# Altium PCB PCB_smart_home.PcbDoc
Units mil, origin at the board's own origin, x right, y up, seen from the top; angles counter-clockwise.
Board outline 3030 x 1590 mil, 2 copper layers (Top Layer, Bottom Layer); 22 components, 27 nets, 114 pads, 38 vias.
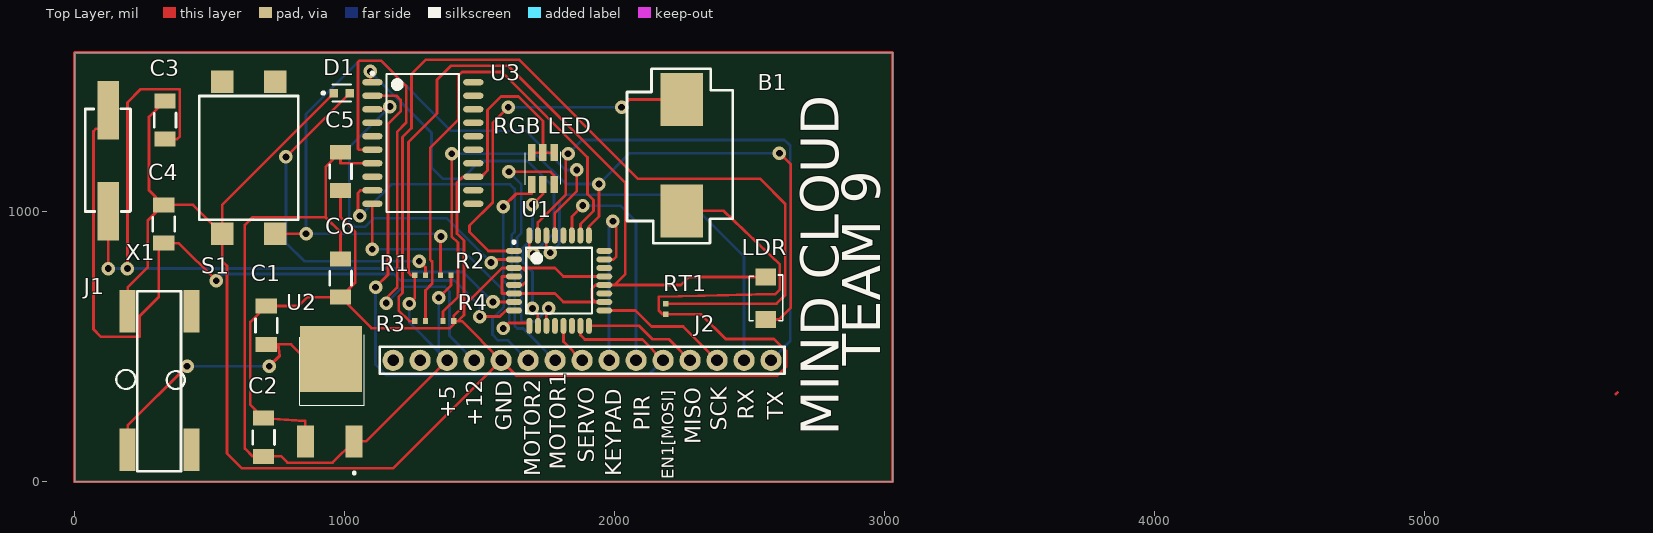
[diagram p0: Top Layer view]
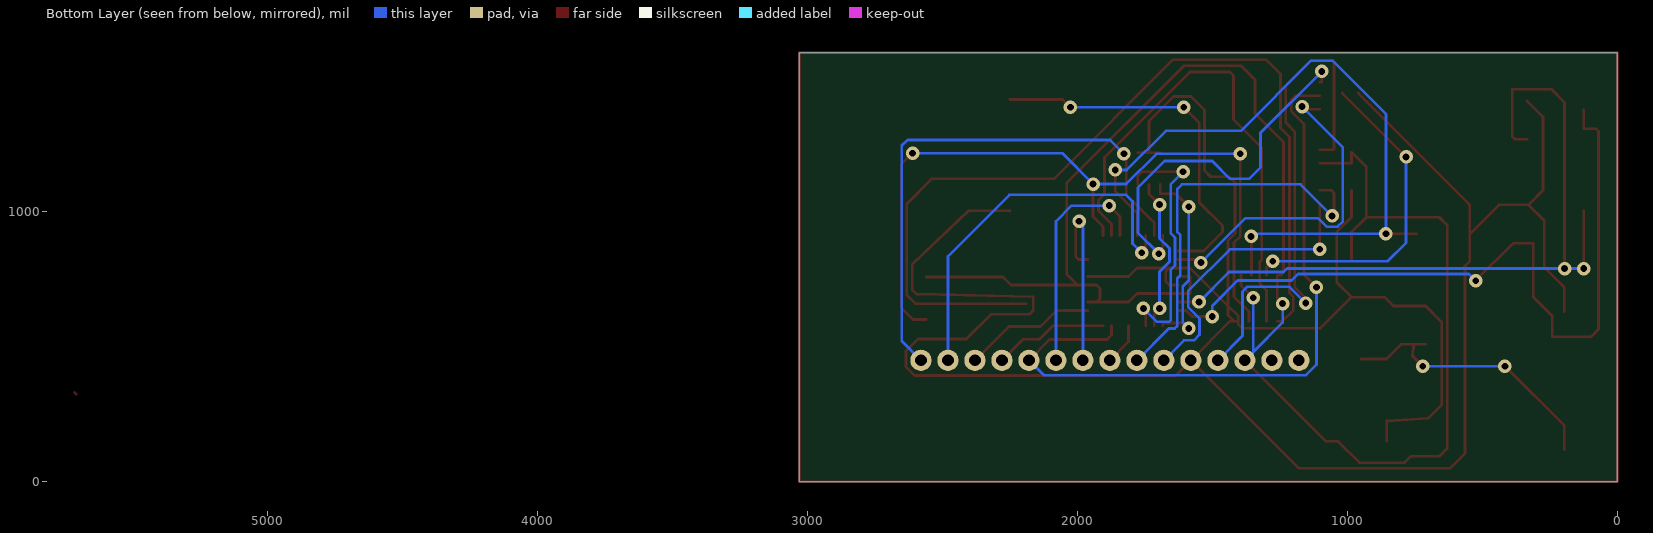
[diagram p1: Bottom Layer view, seen from below]

## Layer stack, top to bottom
Top Solder: solder mask 0.4, Solder Resist, Dk 3.5
Top Layer: signal copper 1.4
Dielectric 1: dielectric 12.6, FR-4, Dk 4.8
Bottom Layer: signal copper 1.4
Bottom Solder: solder mask 0.4, Solder Resist, Dk 3.5

## Board outline
0,0 0,1590 3030,1590 3030,0

## Design rules (kind name [scope] priority, off if disabled: settings)
Clearance [All] p1: gap=10 ignorepadtopadclearanceinfootprint=FALSE
PolygonConnect [All] p1: connectstyle=Relief reliefconductorwidth=10 reliefentries=4 polygonreliefangle="90 Angle" airgapwidth=10
RoutingVias [All] p1: holewidth=25 width=50 viastyle="Through Hole" minholewidth=25 minwidth=50 maxholewidth=25 maxwidth=50
SolderMaskExpansion [All] p1: expansion=4 istentingtop=FALSE
SupplyNets "Schematic Supply Nets_2" [InNet('+12')] p1: voltage=0.000
SupplyNets "Schematic Supply Nets_1" [InNet('GND')] p2: voltage=0.000
SupplyNets "Schematic Supply Nets" [InNet('+5')] p3: voltage=0.000
Width [All] p1: maxlimit=10 minlimit=10 preferedwidth=10
30 further rules are at their usual default settings.

## Components (designator, comment, footprint, x,y, rotation, side; value= is the part's Value field where it differs from the comment)
B1 "CMT-1271-88-SMT-TR" PCBComponent_1#1 2250,1210 r0 top
C1 "0.33uF" PCBComponent_1#2 710,580 r90 top
C2 "0.1uF" PCBComponent_1#2 700,165 r90 top
C3 "22PF" PCBComponent_1#2 335,1340 r90 top
C4 "22PF" PCBComponent_1#2 330,955 r90 top
C5 "100nF" PCBComponent_1#2 985,1150 r90 top
C6 "100nF" PCBComponent_1#2 985,755 r90 top
D1 "LTST-C191TBKT" FP-LTST-C191TBKT-MFG 990,1440 r0 top
J1 "PJ-002AH-SMT-TR" PCBComponent_1#3 315,375 r90 top
J2 "TSM-108-01-L-SV" Header 2580,450 r180 top
LDR "RS1G" PCBComponent_1#4 2560,680 r0 top
R1 "330 Ω" RESC1005X04N 1280,765 r0 top
R2 "1K" RESC1005X04N 1375,765 r0 top
R3 "resistor SMD" RESC1005X04N 1280.31,595 r0 top
R4 "10k" RESC1005X04N 1384.68,595 r0 top
"RGB LED" "ASMB-TTF2-0B20B" PCBComponent_1#5 1735,1160 r90 top
RT1 "10K" RESC1005X04N 2190,640 r90 top
S1 "TS16-1212-85-BK-100-SMT-TR" PCBComponent_1#6 645,1200 r90 top
U1 "ATMEGA8A-AU_C16190" TQFP80P900X900X120-32N 1795,745 r0 top
U2 "MC78M05ACDTRKG" PCBComponent_1#7 949.92,455 r270 top
U3 "Driver L293D" SOIC127P1030X265-20N 1290,1255 r0 top
X1 "16 MHZ" PCBComponent_1#8 125,1190 r90 top

## Footprints (in the part's own frame and the unit in brackets; to place one, negate y for a bottom-side part, rotate by r counter-clockwise, add the part's x,y. Pads: shape width x height; smd on the part's side, far side on the other; paste and mask are expansions set on the pad)
FP-LTST-C191TBKT-MFG [mm]
  rect 0.8x0.8 smd paste+0 mask+0: 1(-0.75,0) 2(0.75,0)
  silkscreen extent -1.87,-0.8 0.85,0.8, body extent -1.25,-0.55 1.25,0.55, height 0.25
Header [mm] "SIL Header"
  round 2 hole 1.1: 1(0,0) 2(2.54,0) 3(5.08,0) 4(7.62,0) 5(10.16,0) 6(12.7,0) 7(15.24,0) 8(17.78,0) 9(20.32,0) 10(22.86,0) 11(25.4,0) 12(27.94,0) 13(30.48,0) 14(33.02,0) 15(35.56,0)
  silkscreen extent -1.27,-1.27 36.83,1.27, body extent -1.33,-1.35 36.93,1.35, height 8.6
PCBComponent_1#1 [mm]
  rect 4x5 smd: 1(0,5.25) 2(0,-5.25)
  silkscreen extent -5.18,-8.28 4.78,8.13, body extent -6.55,-6.82 6.25,7.08, height 7.15
PCBComponent_1#2 [mm]
  rect 1.4x2 smd: 1(-1.8,0) 2(1.8,0)
  silkscreen extent -0.69,-1.04 0.66,1.02, body extent -1.65,-1 1.55,0.8, height 1.6
PCBComponent_1#3 [mm]
  rect 4x1.5 smd: 1(-6.5,3) 2(6.5,3) 3(6.5,-3) 4(-6.5,-3)
  silkscreen extent -8.53,-2.37 8.41,4.07, body extent -6.05,-6.93 6.55,7.97, height 11.01
PCBComponent_1#4 [mm]
  rect 1.9x1.6 smd: 1(0,2) 2(0,-2)
  silkscreen extent -1.55,-2.13 1.6,2.18, body extent -1.38,-2.54 1.18,2.6, height 2.58
PCBComponent_1#5 [mm]
  rect 1.6x0.7 smd: 1(-1.5,1.05) 2(1.5,1.05) 3(-1.5,0) 4(1.5,0) 5(-1.5,-1.05) 6(1.5,-1.05)
  silkscreen extent -1.52,-1.65 1.57,1.68, body extent -1.85,-1.72 1.85,1.78, height 2.8
PCBComponent_1#6 [mm]
  rect 2.1x2.1 smd: 1(-7.15,2.5) 2(-7.15,-2.5) 3(7.15,2.5) 4(7.15,-2.5)
  silkscreen extent -5.82,-4.67 5.82,4.65, body extent -7.6,-6.23 7.6,5.77, height 8.8
PCBComponent_1#7 [mm]
  rect 6.2x5.8 smd: 1(0,0)
  rect 3x1.6 smd: 2(7.747,2.159) 3(7.747,-2.411)
  silkscreen extent -2.29,-2.95 10.82,3.15, body extent -1.85,-3.3 8.05,3.2, height 2.59
PCBComponent_1#8 [mm]
  rect 5.5x2 smd: 1(-4.75,0) 2(4.75,0)
  silkscreen extent -4.8,-2.08 4.88,2.16, body extent -6.55,-2.33 6.65,2.47, height 4.31
RESC1005X04N [mm] "Chip Resistor, 2-Leads, Body 1.00x0.50mm, IPC Medium Density"
  rect 0.5x0.55 smd: 1(-0.5,0) 2(0.5,0)
  body extent -0.53,-0.28 0.53,0.28, height 0.4
SOIC127P1030X265-20N [mm] "SOIC, 20-Leads, Body 12.80x7.50mm, Pitch 1.27mm, IPC Medium Density"
  oval 1.9x0.6 smd: 1(-4.75,5.715) 2(-4.75,4.445) 3(-4.75,3.175) 4(-4.75,1.905) 5(-4.75,0.635) 6(-4.75,-0.635) 7(-4.75,-1.905) 8(-4.75,-3.175) 9(-4.75,-4.445) 10(-4.75,-5.715) 11(4.75,-5.715) 12(4.75,-4.445) 13(4.75,-3.175) 14(4.75,-1.905) 15(4.75,-0.635) 16(4.75,0.635) 17(4.75,1.905) 18(4.75,3.175) 19(4.75,4.445) 20(4.75,5.715)
  silkscreen extent -4.87,-6.5 3.4,6.69, body extent -5.16,-6.5 5.16,6.5, height 2.65
TQFP80P900X900X120-32N [mm] "TQFP, 32-Leads, Body 7.00x7.00mm, Pitch 0.80mm, IPC Medium Density"
  oval 1.5x0.55 smd: 1(-4.25,2.8) 2(-4.25,2) 3(-4.25,1.2) 4(-4.25,0.4) 5(-4.25,-0.4) 6(-4.25,-1.2) 7(-4.25,-2) 8(-4.25,-2.8) 17(4.25,-2.8) 18(4.25,-2) 19(4.25,-1.2) 20(4.25,-0.4) 21(4.25,0.4) 22(4.25,1.2) 23(4.25,2) 24(4.25,2.8)
  oval 0.55x1.5 smd: 9(-2.8,-4.25) 10(-2,-4.25) 11(-1.2,-4.25) 12(-0.4,-4.25) 13(0.4,-4.25) 14(1.2,-4.25) 15(2,-4.25) 16(2.8,-4.25) 25(2.8,4.25) 26(2,4.25) 27(1.2,4.25) 28(0.4,4.25) 29(-0.4,4.25) 30(-1.2,4.25) 31(-2,4.25) 32(-2.8,4.25)
  silkscreen extent -4.37,-3.1 3.1,3.75, body extent -4.5,-4.5 4.5,4.5, height 1.2

## Part data
B1: library part buzzer, "88dB Passive (external drive) Electromagnetic Type 2.4kHz Buzzers ROHS", manufactor=CUI, supplier part number=C3811771, ComponentLink1Description="snapeda link", ComponentLink1URL=https://www.snapeda.com/parts/CMT-1271-88-SMT-TR/CUI%20Devices/view-part/?ref=search&t=Buzzer%20smd, ComponentLink2Description=datasheet, ComponentLink2URL=https://www.snapeda.com/parts/CMT-1271-88-SMT-TR/CUI%20Devices/datasheet/, manufactor part number=CMT-1271-88-SMT-TR, supplier=LCSC
C1 C2 C3 C4 C5 C6: library part "capacitor_1206 CODE", "100V 100nF C0G ±5% 1206 Multilayer Ceramic Capacitors MLCC - SMD/SMT ROHS", manufactor="Murata Electronics", manufactor part number=GRM31C5C2A104JA01L, supplier part number=C405303, ComponentLink1Description="snapeda link", ComponentLink1URL=https://www.snapeda.com/parts/GRM31C5C2A104JA01L/Murata/view-part/?ref=search&t=1206%20cap%20smd, ComponentLink2Description=Datasheet, ComponentLink2URL=https://www.snapeda.com/parts/GRM31C5C2A104JA01L/Murata/datasheet/, supplier=LCSC
D1: library part CMP-22017-000008-1, "LED BLUE CLEAR CHIP SMD", Case Code (Imperial)=0603, Case Code (Metric)=1608, Color=Blue, Forward Current=20mA, Forward Voltage=3.8V, Lens Color=Colorless, Max Operating Temperature=80°C, Max Power Dissipation=75mW, Min Operating Temperature=-20°C, Package Quantity=1, Power Dissipation=76mW, Reverse Voltage=5V, Case/Package=0603, Depth=1.6mm, Dominant Wavelength=475nm, Height=0.55mm, Illumination Color=Blue, Lead Free="Lead Free", Length=0.8mm, Lens Style=Diffused, Lens Transparency=Clear, Luminous Intensity=180mcd, Mount="Surface Mount", Number of Elements=1, Number of LEDs=1, Number of Pins=2, Packaging="Tape and Reel", Radiation Hardening=No, Test Current=20mA, Viewing Angle=130°, Wavelength=468nm, Width=0.8mm
J1: library part "DC connector", "SMD DC Power Connectors ROHS", Manufacturer=CUI, package=SMD, supplier part number=C22434687, ComponentLink1Description="snapeda link", ComponentLink1URL=https://www.snapeda.com/parts/PJ-002AH-SMT-TR/CUI%20Devices/view-part/?ref=search&t=DC%20connector%20SMD, ComponentLink2Description=datasheet, ComponentLink2URL=https://www.snapeda.com/parts/PJ-002AH-SMT-TR/CUI%20Devices/datasheet/, Manufacturer part number=PJ-002AH-SMT-TR, supplier=LCSC
J2: package=None, Availability=Unavailable, MF=Samtec, MP=TSM-108-01-L-SV, Price=None
LDR: library part "LDR sensor", "1A Independent Type 1.3V@1A 400V SMA(DO-214AC) Diodes - General Purpose ROHS", manufactor="SMC(Sangdest Microelectronicstronic (Nanjing))", ComponentLink1Description=snapeda, ComponentLink1URL=https://www.snapeda.com/parts/RS1G/Taiwan%20Semiconductor/view-part/?ref=search&t=LDR%20sensor%20smd, ComponentLink2Description=datasheet, ComponentLink2URL=https://www.snapeda.com/parts/RS1G/Taiwan%20Semiconductor/datasheet/, manufactor part time=RS1G, supplier=LCSC, supplier part time=C260336
R1 R2 R3 R4: library part Resistor, "500mW Thick Film Resistors 400V ±100ppm/℃ ±1% 100Ω 1210 Chip Resistor - Surface Mount ROHS", Manufacturer=PANASONIC, Manufacturer part number=ERJ-U14F1000U, supplier part number=C1014086, ComponentLink1Description=Datasheet, ComponentLink1URL=https://www.lcsc.com/datasheet/lcsc_datasheet_2201131530_PANASONIC-ERJ-U14F1000U_C1014086.pdf, supplier=Lcsc
"RGB LED": library part "RGB LED", "PLCC-6 RGB LEDs ROHS", manufactor="Broadcom Limited", supplier part number=C6126294, ComponentLink1Description="snapeda link", ComponentLink1URL=https://www.snapeda.com/parts/ASMB-TTF2-0B20B/Broadcom%20%2F%20Avago/view-part/?ref=search&t=RGB%20led%20smd, ComponentLink2Description=datasheet, ComponentLink2URL=https://www.snapeda.com/parts/ASMB-TTF2-0B20B/Avago%20Technologies/datasheet/, ComponentLink3Description="LCSC link", ComponentLink3URL=https://www.lcsc.com/product-detail/RGB-LEDs_Broadcom-Limited-ASMB-TTF2-0B20B_C6126294.html, manufactor part number=ASMB-TTF2-0B20B, supplier=LCSC
RT1: library part "NTC temperature sensor", "10kΩ ±0.5% 3380K ±0.7% 0402 NTC Thermistors ROHS / Recommended For You", Manufacturer="Murata Electronics", Manufacturer part number=NCU15XH103D6SRC, supplier part number=C17294780, ComponentLink1Description=datasheet, ComponentLink1URL=https://www.lcsc.com/datasheet/lcsc_datasheet_2401291008_Murata-Electronics-NCU15XH103D6SRC_C17294780.pdf, supplier=lcsc
S1: library part switch, "50mA Standing paste SPST - normally open 100gf 12V Tactile Switches ROHS", manufactor=CUI, supplier part number=C6338790, ComponentLink1Description=snapeda, ComponentLink1URL=https://www.snapeda.com/parts/TS16-1212-85-BK-100-SMT-TR/CUI%20Devices/view-part/?ref=search&t=switch%20smd, ComponentLink2Description=datasheet, ComponentLink2URL=https://www.snapeda.com/parts/TS16-1212-85-BK-100-SMT-TR/CUI%20Devices/datasheet/, manufactor part time=TS16-1212-85-BK-100-SMT-TR, supplier=LCSC
U1: library part ATMEGA8A-AU, "8KB 1KB FLASH 23 2.7V~5.5V AVR 16MHz TQFP-32(7x7) Microcontrollers (MCU/MPU/SOC) ROHS", Manufacturer="Microchip Tech", supplier part number=C16190, ComponentLink1Description=Datasheet, ComponentLink1URL=https://www.lcsc.com/datasheet/lcsc_datasheet_1810161120_Microchip-Tech-ATMEGA8A-AU_C16190.pdf, Manufacturer part number=ATMEGA8A-AU, supplier=LCSC
U2: library part regulator, "500mA 80dB@(120Hz) Fixed 5V Positive electrode 35V TO-252-2(DPAK) Voltage Regulators - Linear, Low Drop Out (LDO) Regulators ROHS", Manufacturer=onsemi, supplier part number=C232660, ComponentLink1Description="snapeda link", ComponentLink1URL=https://www.snapeda.com/parts/MC78M05ACDTRKG/onsemi/view-part/?ref=search&t=regulator%205v%20smd, ComponentLink2Description=Datasheet, ComponentLink2URL=https://www.snapeda.com/parts/MC78M05ACDTRKG/onsemi/datasheet/, ComponentLink3Description="LCSC link", ComponentLink3URL=https://www.lcsc.com/product-detail/Voltage-Regulators-Linear-Low-Drop-Out-LDO-Regulators_onsemi-MC78M05ACDTRKG_C232660.html, Manufacturer part number=MC78M05ACDTRKG, supplier=LCSC
U3: "SOIC-20-300mil Stepper Motor Driver ROHS", Manufacturer=STMicroelectronics, Manufacturer part number=L293DD013TR, supplier part number=C21610, ComponentLink1Description=datasheet, ComponentLink1URL=https://www.lcsc.com/datasheet/lcsc_datasheet_2304140030_STMicroelectronics-L293DD013TR_C21610.pdf, supplier=LCSC
X1: library part crystal, "16MHz ±30ppm ±50ppm HC-49S-SMD Crystals ROHS", ComponentLink1Description="snapeda link", ComponentLink1URL=https://www.snapeda.com/parts/ECS-160-S-5P-TR/ECS%20International/view-part/?ref=search&t=16MHZ%20crystl, ComponentLink2Description=datasheet, ComponentLink2URL=https://www.lcsc.com/datasheet/lcsc_datasheet_2211020230_ECS-ECS-160-S-5P-TR_C2450888.pdf, ComponentLink3Description="LCSC link", ComponentLink3URL=https://www.lcsc.com/product-detail/Crystals_span-style-background-color-ff0-ECS-span-ECS-160-S-5P-TR_C2450888.html

## Via types
v1: diameter 50, hole 25, Top Layer to Bottom Layer, 38 vias

## Nets (pads, with @x,y where several pads share a name; then routed paths per layer and width w, separated by ;. In a path a pad name is that pad's centre, name@x,y a point inside that pad or via, vN(x,y) a via of type N, cw(c..) or ccw(c..) an arc to the next point about the centre after c; other vN are vias at no path point)
+5: C2.1 C5.2 C6.2 J2.13 LDR.1 R1.1 R2.2 U1.4 U1.6 U1.18 U1.20 U2.2 U3.7 | length 6644.3
  Top Layer w10: C6.2 985,925 930,980 ; U3.7 985,1180 C5.2 930,1165.87 930,980 ; v1(1240.32,660) 1260.32,680 R1.1 1247,765 1237,775 1237,1258.51 1342.77,1364.28 1342.77,1489.3 1394.5,1541.03 1605.98,1541.03 2040,1107.01 2040,769.25 2000,729.25 ; v1(1349,682) 1394.69,727.69 R2.2 ; J2.13 1080,150 U2.2 955.92,71 789,71 765.87,94.13 C2.1 660,94.13 631,123.13 631,951 660,980 930,980 ; U1.4 1583,760.75 1583,697.76 U1.6 1779,697.76 1810.5,666.26 1930,666.26 ; U1.18 1930,666.26 ; LDR.1 2275.49,758.74 2246,729.25 2000,729.25 ; 1930,666.26 1917,679.26 1917,716.25 1930,729.25 U1.20 2000,729.25
  Bottom Layer w10: v1(1240.32,660) 1240.32,589.68 1349,481 ; v1(1349,682) 1349,481 ; J2.13 1349,481
+12: J2.12 U3.6 | length 1988.8
  Top Layer w10: U3.6 1053,1230 1050.28,1232.72 1050.28,1555.28 1055,1560 1135,1560 1228.39,1466.61 1228.39,1329.91 1195,1296.51 1195,720 1155,680 v1(1155,662)
  Bottom Layer w10: v1(1155,662) 1215.12,722.12 1371.88,722.12 1389,705 1389,541 J2.12
BLUE: "RGB LED.5" U1.11 | length 980.4
  Top Layer w10: v1(1608.86,1148) 1763.34,1148 1776.34,1135 1776.34,1100.94 ; U1.11 1747.76,633.76 v1(1756,642)
  Bottom Layer w10: v1(1608.86,1148) 1655,1101.86 1655,921 1639,905 1639,801 1655,785 1655,598 1660,593 1707,593 v1(1756,642)
BUZZER: B1.1 U1.1 | length 1371.5
  Top Layer w10: v1(1606,1387) 1549.41,1330.41 1549.41,1035.41 1463,949 1463,925 1532.76,855.24 U1.1 ; v1(2026,1387) 2055,1416 2250,1416 B1.1
  Bottom Layer w10: v1(1606,1387) v1(2026,1387)
EN1: J2.5 U1.15 U3.2 | length 2614
  Top Layer w10: U3.2 1193,1430 1208,1415 1208,1372 1161,1325 1161,767 v1(1115,721) ; U1.15 1873.74,543.26 1890,527 2103,527 J2.5
  Bottom Layer w10: v1(1115,721) 1115,434 1154,395 2125,395 J2.5
GND: "RGB LED.2" "RGB LED.4" "RGB LED.6" B1.2 C1.2 C2.2 C3.2 C4.2 C5.1 C6.1 D1.1 J1.2 J2.11 R4.2 RT1.1 S1.1 U1.3 U1.5 U1.21 U2.3 U3.13 | length 10845.7
  Top Layer w10: J1.2 196.89,719.89 271,794 271,966.87 C4.2 ; C3.2 276,1351.87 276,1079.87 C4.2 ; U2.3 855,225 C2.2 651,284.87 651,591.87 C1.2 830,650.87 863.27,684.13 C6.1 ; D1.1 546.58,1026.1 S1.1 ; C5.1 985,980 1040,925 1040,739.13 C6.1 ; U1.5 1660,729.25 1673,742.25 1673,779.24 1660,792.24 ; 1693.66,1219.06 1735,1219.06 ; 1776.34,1219.06 1735,1219.06 ; U1.21 1810.5,760.75 1779,792.24 1660,792.24 ; B1.2 2250,1004 2403,1004 2612.4,805 2612.4,712.24 2596.16,696 2164,685 2164,635 2178.68,620.32 RT1.1 2320.68,620.32 2412,529 2591,529 2635,485 2635,425 2604,394 1636,394 J2.11 ; C4.2 439.21,1025.87 S1.1 ; S1.1 546.58,818.42 565,800 565,105 620,50 1180,50 J2.11 ; C6.1 1100.13,569 1390,569 1404.37,583.37 R4.2 ; R4.2 1420,595 ; R4.2 1404.37,613.61 1442.22,651.46 ; 1420,595 1435,595 J2.11 ; 1420,595 1442.22,617.22 1442.22,651.46 ; 1442.22,651.46 1442.22,893.78 1417,919 1417,1108 1439,1130 U3.13 1506.41,1130 1529.41,1153 1529.41,1376.41 1580,1427 1644,1427 1735,1336 1735,1219.06 ; 1442.22,651.46 1583,792.24 U1.3 1660,792.24
GREEN: "RGB LED.3" U1.10 | length 578.5
  Top Layer w10: v1(1696,642) 1716.26,621.74 U1.10 ; v1(1696,1027) 1735,1066 1735,1100.94
  Bottom Layer w10: v1(1696,642) 1696,778 1659,815 1659,865 1696,902 v1(1696,1027)
IN1: U1.32 U3.1 | length 1386.9
  Top Layer w10: v1(1095,1520) 1095,1480 U3.1 ; U1.32 1684.76,859.24 v1(1699,845)
  Bottom Layer w10: v1(1095,1520) 1322,1293 1322,1165 1365,1122 1435,1122 1501,1188 1678,1188 1776,1090 1776,922 v1(1699,845)
IN2: U1.2 U3.3 | length 1261.3
  Top Layer w10: U3.3 1158,1380 v1(1168,1390) ; v1(1543,812) 1554.74,823.74 U1.2
  Bottom Layer w10: v1(1168,1390) 1017,1239 1017,965 1037,945 1077,945 1108,976 1379,976 v1(1543,812)
KEYPAD: J2.7 U1.23 | length 705.3
  Top Layer w10: U1.23 1995.59,823.74 2006.85,835 2006.85,952.15 v1(1994,965)
  Bottom Layer w10: J2.7 1980,951 v1(1994,965)
LDR: LDR.2 R4.1 U1.25 | length 2866.4
  Top Layer w10: R4.1 1365,630 1420,685 1420,886 1397,909 v1(1397,1215) ; U1.25 1905.24,945.99 1942.24,983 v1(1942.24,1103) ; LDR.2 2609.26,601.26 2653,645 2653,1175 v1(2611,1217)
  Bottom Layer w10: v1(1397,1215) 1708,1215 1820,1103 v1(1942.24,1103) 2056.24,1217 v1(2611,1217)
MISO: J2.4 U1.16 | length 428.1
  Top Layer w10: U1.16 1905.24,578 2090,578 2140,528 2202,528 J2.4
MOTOR1: J2.9 U3.9 | length 1492.6
  Top Layer w10: v1(1057,985) 1050,992 1050,1070 1060,1080 U3.9
  Bottom Layer w10: v1(1057,985) 1174,1102 1612.88,1102 1630,1084.88 1630,925 1619,914 1619,765 1630,754 1630,578 1640,568 1662,568 J2.9
MOTOR2: J2.10 U3.10 | length 1070
  Top Layer w10: v1(1103,861) U3.10
  Bottom Layer w10: v1(1103,861) 1435,861 1590,706 1590,647 1548,605 1548,545 1569,524 1606,524 J2.10
NetC1_1: C1.1 J1.1 U2.1 | length 1064.2
  Top Layer w10: J1.1 196.89,208 v1(416.89,428) ; C1.1 753.87,509.13 ; v1(721,428) 760,467 753.87,509.13 ; U2.1 856.13,455 802,509.13 753.87,509.13
  Bottom Layer w10: v1(416.89,428) v1(721,428)
NetD1_2: D1.2 R1.2 | length 1236.5
  Top Layer w10: v1(783,1203.47) D1.2 ; v1(1277,817) 1299.69,794.31 R1.2
  Bottom Layer w10: v1(783,1203.47) 783,885 851,817 v1(1277,817)
NetR3_1: R3.1 RT1.2 | length 3392.8
  Top Layer w10: R3.1 1240,595 1200.32,634.68 1200.32,685.32 1215,700 1215,1276.51 1248.39,1309.91 1248.39,1510.39 1301.49,1563.49 1645.51,1563.49 2087,1122 2540,1122 2632.4,1029.6 2632.4,692.24 2599.85,659.69 RT1.2
NTC: R3.2 U1.26 | length 1900.3
  Top Layer w10: R3.2 1300,709 1325,734 1325,815 1317,823 1317,1237 1422,1342 1422,1505 1435,1518 1583.71,1518 1900,1201.71 1900,1065.24 1922.24,1043 1922.24,1003 1873.74,954.5 U1.26
PIR: J2.6 U1.27 | length 864
  Top Layer w10: U1.27 1842.24,983 v1(1882.24,1023)
  Bottom Layer w10: v1(1882.24,1023) 2022,1023 2080,965 J2.6
RED: "RGB LED.1" U1.9 | length 744.1
  Top Layer w10: v1(1588,568) 1608,588 1684.76,588 U1.9 ; v1(1588,1019) 1636,1067 1693.66,1067 1693.66,1100.94
  Bottom Layer w10: v1(1588,568) 1610,590 1610,724.26 1588,746.26 v1(1588,1019)
RESET: R2.1 S1.2 U1.29 | length 2734.4
  Top Layer w10: S1.2 v1(857.5,918.5) ; R2.1 1355.32,907.32 v1(1357,909) ; U1.29 1779.25,994.97 1860,1075.71 v1(1860,1155)
  Bottom Layer w10: v1(1357,909) 1347.5,918.5 v1(857.5,918.5) 857.5,1362.5 1055,1560 1135,1560 1395,1300 1673,1300 1818,1155 v1(1860,1155)
RX: J2.2 U1.30 | length 1448.7
  Top Layer w10: U1.30 1747.76,862.24 v1(1762,848)
  Bottom Layer w10: v1(1762,848) 1796,882 1796,1039 1820,1063 2252,1063 2480,835 J2.2
SCK: J2.3 U1.17 | length 494.2
  Top Layer w10: U1.17 2078,634.76 2137.23,575.53 2254.47,575.53 J2.3
SERVO: J2.8 U1.13 | length 156.4
  Top Layer w10: U1.13 1810.75,519.25 J2.8
TX: J2.1 U1.31 | length 2026.2
  Top Layer w10: U1.31 1716.26,960.26 1820,1064 1820,1207 v1(1828,1215)
  Bottom Layer w10: v1(1828,1215) 1879,1266 2630,1266 2651,1245 2651,521 J2.1
XTAL1: C3.1 U1.7 X1.1 | length 3207.7
  Top Layer w10: v1(125,790) X1.1 ; v1(196,790) 196,1405 245,1454 390,1454 390,1279.13 380,1269.13 C3.1 ; v1(1548.74,666.26) v1(1550,666.26) U1.7
  Bottom Layer w10: v1(125,790) v1(196,790) 1223.8,790 ; v1(1548.74,666.26) 1438.2,776.8 ; v1(1550,666.26) 1439.46,776.8 1438.2,776.8 ; 1223.8,790 1224,790 1237,777 1438,777 1438.2,776.8 ; 1223.8,790 1237,776.8 1438.2,776.8
XTAL2: C4.1 U1.8 X1.2 | length 2902.8
  Top Layer w10: X1.2 125,1308 80,1308 70,1298 70,565 98,537 242,537 242,615 312,685 312,884.13 C4.1 385.87,884.13 v1(525,745) ; v1(1501,612) 1575,612 1597.76,634.76 U1.8
  Bottom Layer w10: v1(525,745) 550,770 1183,770 1207,746 1407,746 1501,652 v1(1501,612)
pads on no net: J1.3 J1.4 J2.14 J2.15 S1.3 S1.4 U1.12 U1.14 U1.19 U1.22 U1.24 U1.28 U3.4 U3.5 U3.8 U3.11 U3.12 U3.14 U3.15 U3.16 U3.17 U3.18 U3.19 U3.20
copper on no net: | length 9248.3
  Top Layer w10: 5709.14,325 5715,330.86 ; 0,0 3030,0 3030,1590 0,1590 0,0

## Other copper
Top Layer:

## Silkscreen, mask and mechanical layers (free items; w line width, h text height)
Top Overlay:
  text "TEAM 9" at 2985,430 h140 r90
  text "+5" at 1410,235 h60 r90
  text "RX" at 2515,230 h60 r90
  text "TX" at 2625,230 h60 r90
  text "+12" at 1510,205 h60 r90
  text "GND" at 1620,190 h60 r90
  text "PIR" at 2130,190 h60 r90
  text "SCK" at 2415,190 h60 r90
  text "MIND CLOUD" at 2830,170 h140 r90
  text "MISO" at 2320,140 h60 r90
  text "SERVO" at 1925,70 h60 r90
  text "MOTOR1" at 1820,45 h60 r90
  text "MOTOR2" at 1725,20 h60 r90
  text "KEYPAD" at 2025,20 h60 r90
  text "EN1[MOSI]" at 2220,10 h45 r90